# EAGLE board Quad_Board (EAGLE 6.4)
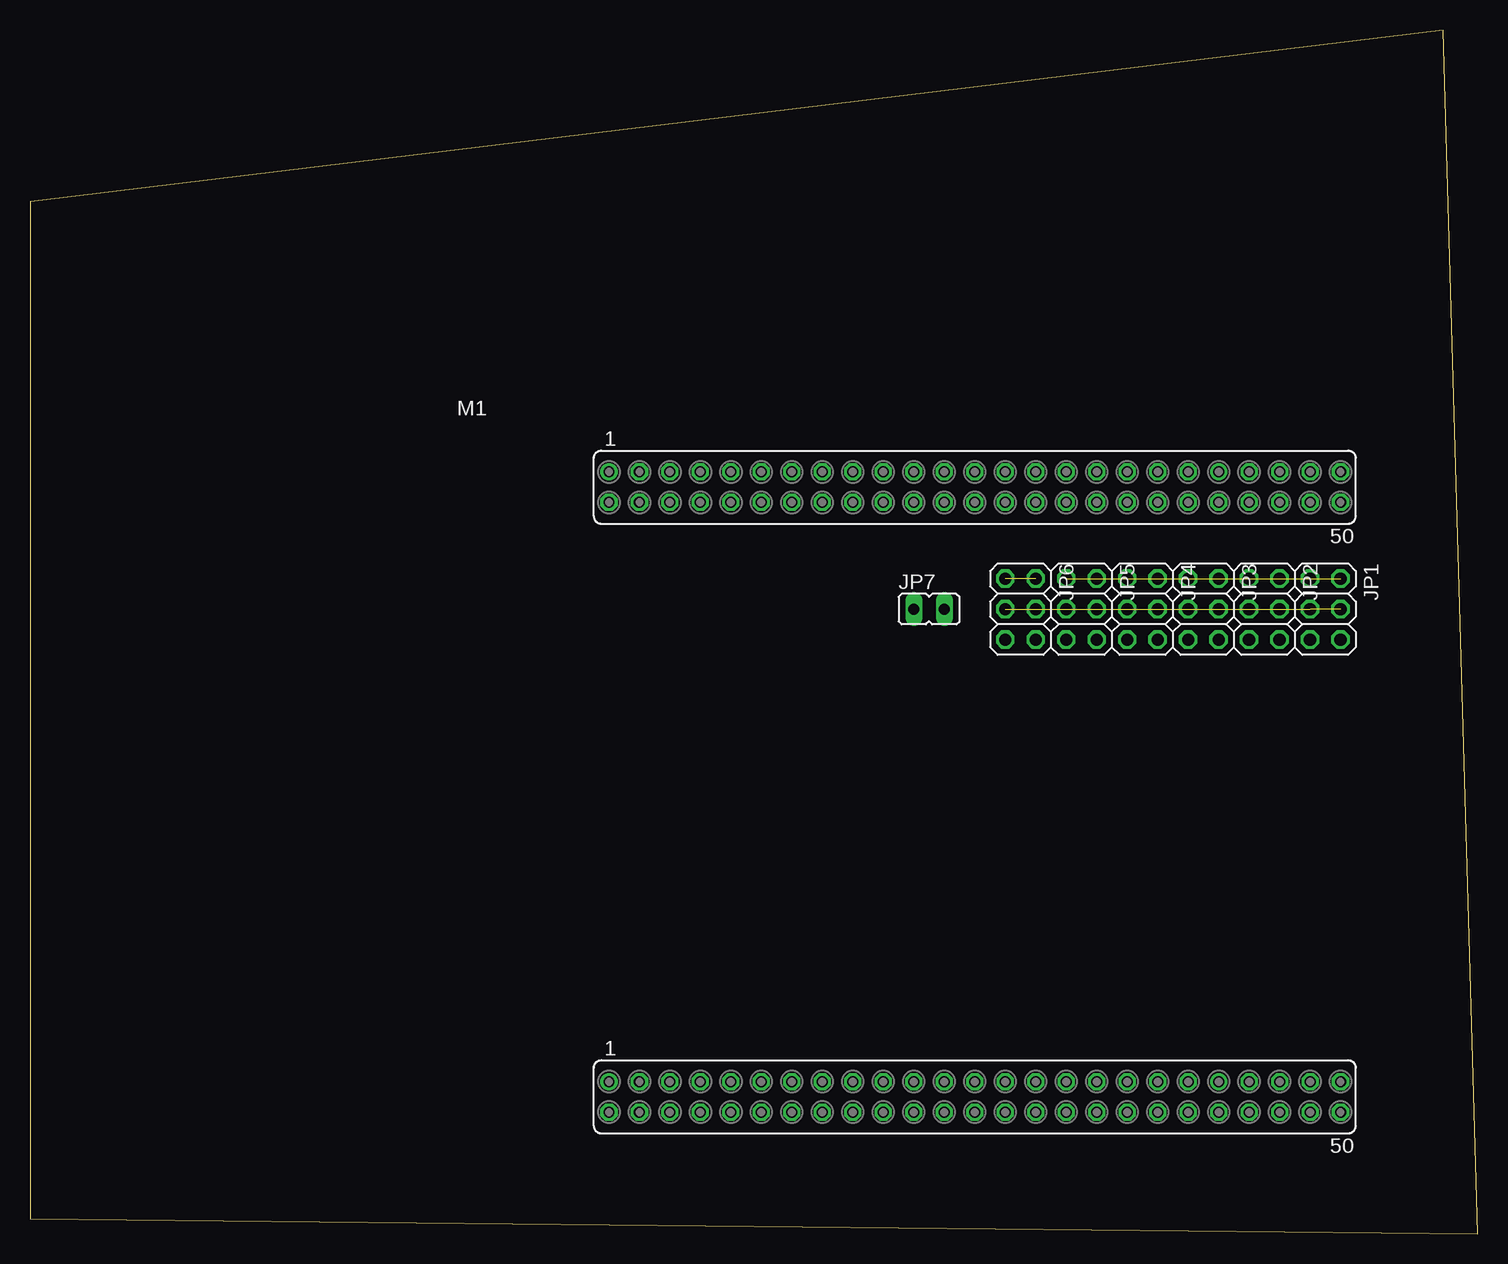
[diagram p0: board, top side]
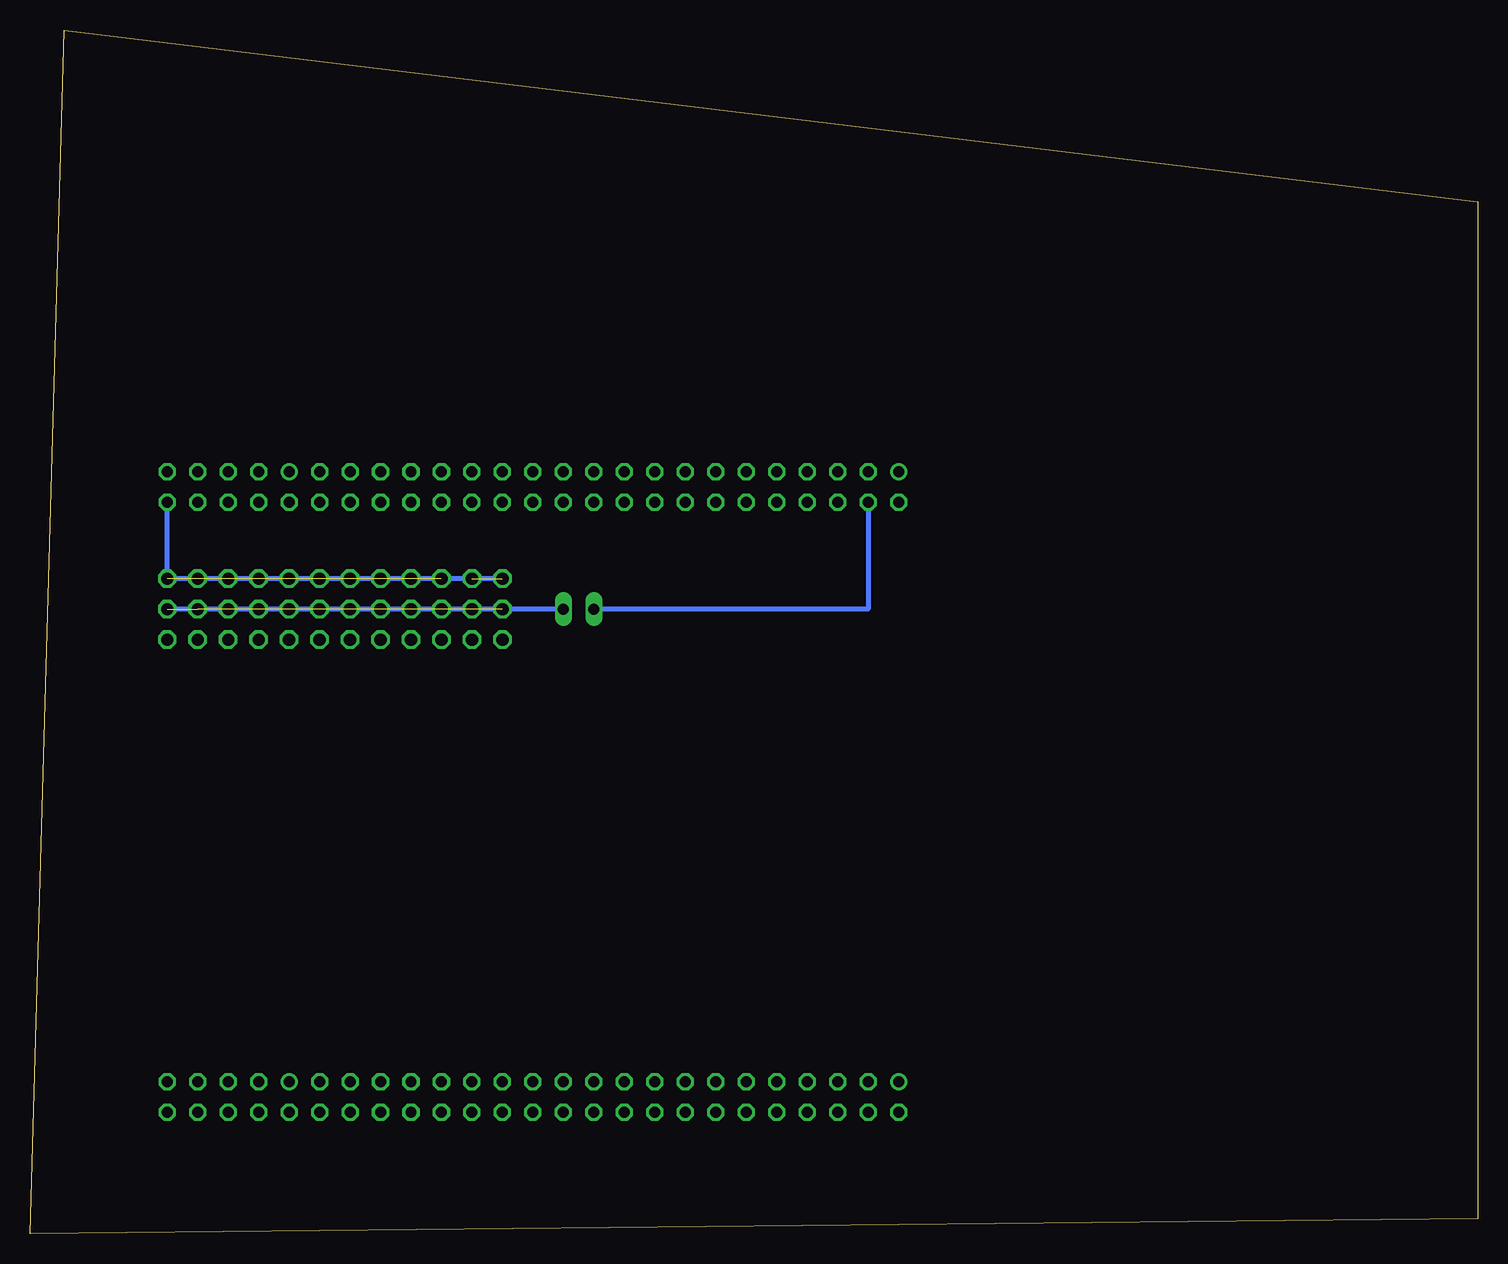
[diagram p1: board, bottom side, seen from below]

Size 120.64 x 100.33 mm. Coordinates in mm from the lower left corner, seen from the top.
Outline: 120.64,0 117.77,100.33 0,86.03 0,1.27 120.64,0
Copper layers (1*16): Top 0.035mm / dielectric 1.5mm / Bottom 0.035mm
Design rules "default": minimum track width 10mil, minimum drill 24mil, track to track 8mil, track to pad 8mil, pad to pad 8mil, via to via 8mil, smd to smd 8mil, copper to edge 40mil, drill to drill 8mil, minimum pad ring 10mil, minimum via ring 8mil, stop-mask expansion 4mil, vias tented up to drill 0mil, thermal gap 10mil

## Footprints (pad centres in the part's own frame; a part is rotated, then mirrored left to right if it is on the bottom)
2X03 = drill 1.016 octagon: 1 -2.54,-1.27; 2 -2.54,1.27; 3 0,-1.27; 4 0,1.27; 5 2.54,-1.27; 6 2.54,1.27
JP1 = drill 0.914 long: 1 0,-1.27; 2 0,1.27
STM32F4DISCOVERY = drill 0.914: 1 -24.13,63.5; 41 -24.13,12.7; 51 26.67,63.5; 91 26.67,12.7 | drill 0.914 octagon: 2 -26.67,63.5; 3 -24.13,60.96; 4 -26.67,60.96; 5 -24.13,58.42; 6 -26.67,58.42; 7 -24.13,55.88; 8 -26.67,55.88; 9 -24.13,53.34; 10 -26.67,53.34; 11 -24.13,50.8; 12 -26.67,50.8; 13 -24.13,48.26; 14 -26.67,48.26; 15 -24.13,45.72; 16 -26.67,45.72; 17 -24.13,43.18; 18 -26.67,43.18; 19 -24.13,40.64; 20 -26.67,40.64; 21 -24.13,38.1; 22 -26.67,38.1; 23 -24.13,35.56; 24 -26.67,35.56; 25 -24.13,33.02; 26 -26.67,33.02; 27 -24.13,30.48; 28 -26.67,30.48; 29 -24.13,27.94; 30 -26.67,27.94; 31 -24.13,25.4; 32 -26.67,25.4; 33 -24.13,22.86; 34 -26.67,22.86; 35 -24.13,20.32; 36 -26.67,20.32; 37 -24.13,17.78; 38 -26.67,17.78; 39 -24.13,15.24; 40 -26.67,15.24; 42 -26.67,12.7; 43 -24.13,10.16; 44 -26.67,10.16; 45 -24.13,7.62; 46 -26.67,7.62; 47 -24.13,5.08; 48 -26.67,5.08; 49 -24.13,2.54; 50 -26.67,2.54; 52 24.13,63.5; 53 26.67,60.96; 54 24.13,60.96; 55 26.67,58.42; 56 24.13,58.42; 57 26.67,55.88; 58 24.13,55.88; 59 26.67,53.34; 60 24.13,53.34; 61 26.67,50.8; 62 24.13,50.8; 63 26.67,48.26; 64 24.13,48.26; 65 26.67,45.72; 66 24.13,45.72; 67 26.67,43.18; 68 24.13,43.18; 69 26.67,40.64; 70 24.13,40.64; 71 26.67,38.1; 72 24.13,38.1; 73 26.67,35.56; 74 24.13,35.56; 75 26.67,33.02; 76 24.13,33.02; 77 26.67,30.48; 78 24.13,30.48; 79 26.67,27.94; 80 24.13,27.94; 81 26.67,25.4; 82 24.13,25.4; 83 26.67,22.86; 84 24.13,22.86; 85 26.67,20.32; 86 24.13,20.32; 87 26.67,17.78; 88 24.13,17.78; 89 26.67,15.24; 90 24.13,15.24; 92 24.13,12.7; 93 26.67,10.16; 94 24.13,10.16; 95 26.67,7.62; 96 24.13,7.62; 97 26.67,5.08; 98 24.13,5.08; 99 26.67,2.54; 100 24.13,2.54

## Placement (x,y rotation side)
JP1  [2X03]  107.94,52.07 270 top
JP2  [2X03]  102.86,52.07 270 top
JP3  [2X03]  97.78,52.07 270 top
JP4  [2X03]  92.7,52.07 270 top
JP5  [2X03]  87.62,52.07 270 top
JP6  [2X03]  82.54,52.07 270 top
JP7  [JP1]  74.92,52.07 270 top
M1  STM32F4DISCOVERY  [STM32F4DISCOVERY]  111.75,36.83 90 top

## Library data of the parts
JP1-JP6 = pinhead
JP7 = jumper
M1 = STM32F4DISCOVERY

## Nets
N$1: JP1.1 JP1.2 JP2.1 JP2.2 JP3.1 JP3.2 JP4.1 JP4.2 JP5.1 JP5.2 JP6.1 JP6.2 M1.100
N$2: JP7.1 M1.54
N$3: JP1.3 JP1.4 JP2.3 JP2.4 JP3.3 JP3.4 JP4.3 JP4.4 JP5.3 JP5.4 JP6.3 JP6.4 JP7.2

## Tracks (layer width: path | path; a pad name or v marks a point on that pad's centre or on a via)
N$1  (10 unrouted)
  Bottom 0.406: JP6.1 JP1.2 M1.100
N$2
  Bottom 0.406: M1.54 50.79,52.07 JP7.1
N$3  (11 unrouted)
  Bottom 0.406: JP7.2 JP1.4